# Altium PCB pcb_ummugul.PcbDoc
Units mm, origin at the board's own origin, x right, y up, seen from the top; angles counter-clockwise.
Board outline 152.4 x 101.6 mm, 2 copper layers (Top Layer, Bottom Layer); 12 components, 15 nets, 62 pads, 10 vias.
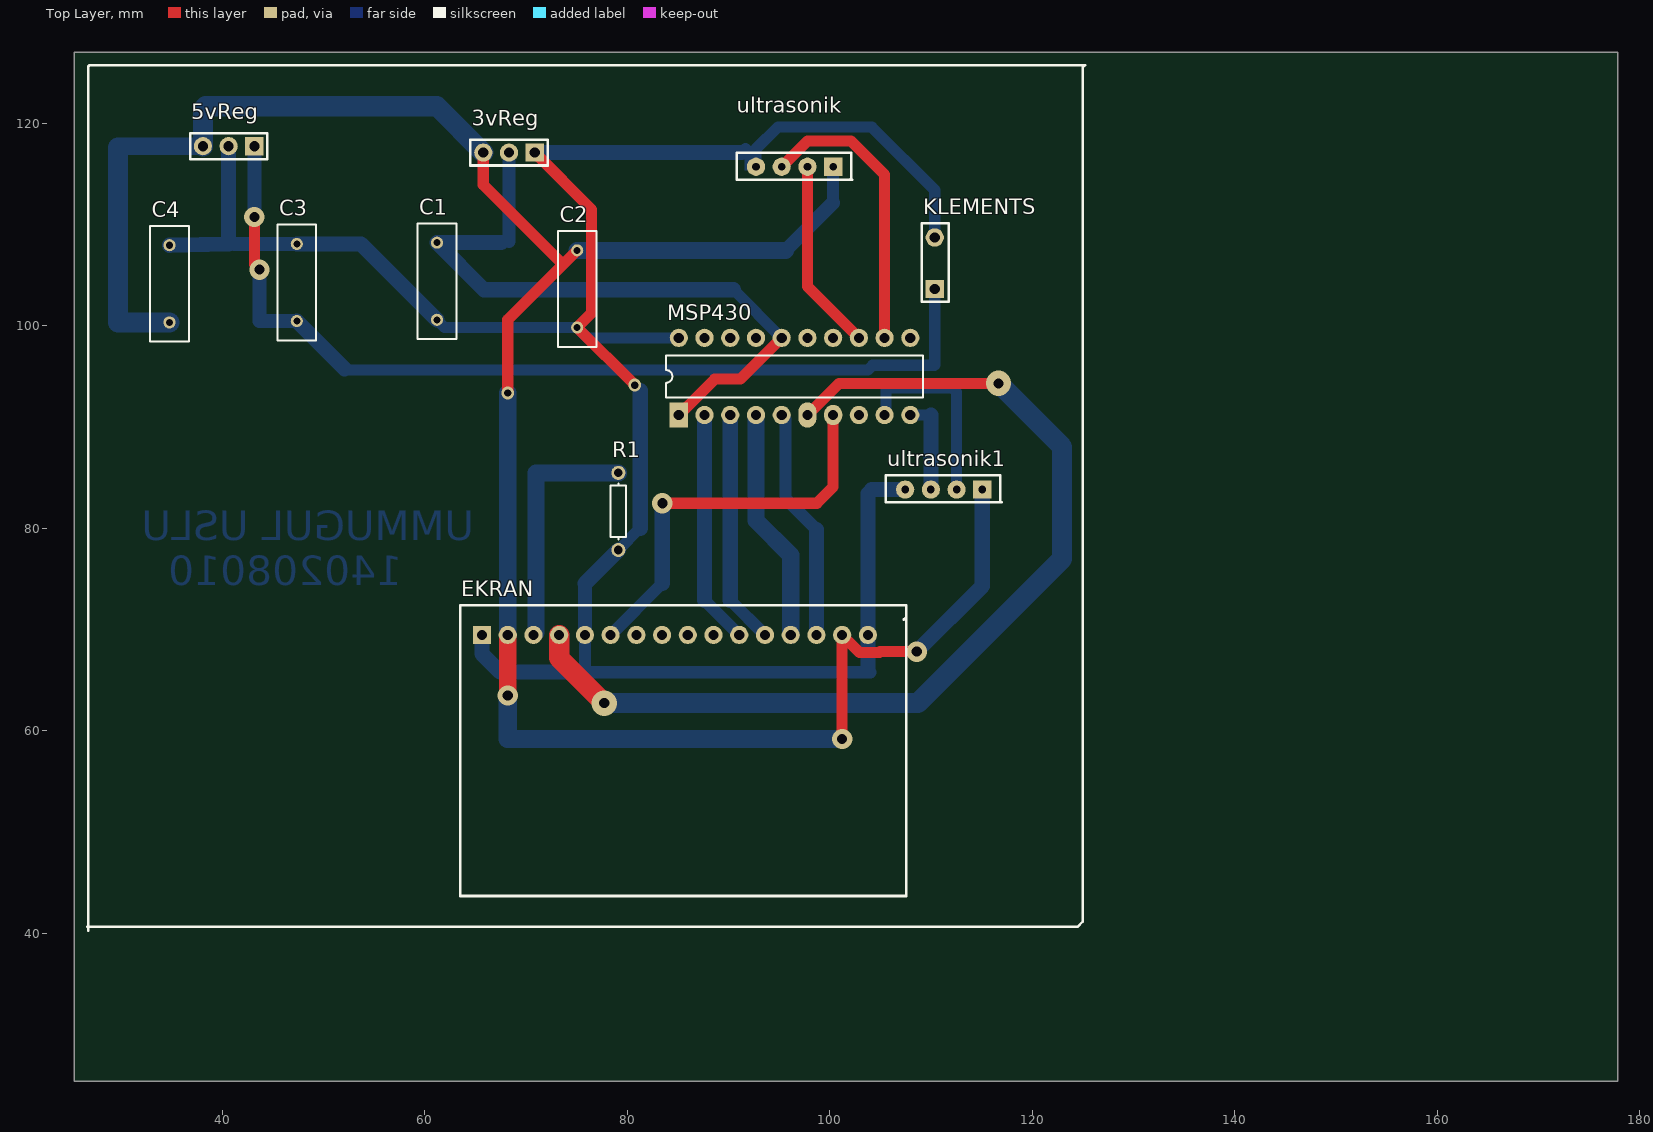
[diagram p0: Top Layer view]
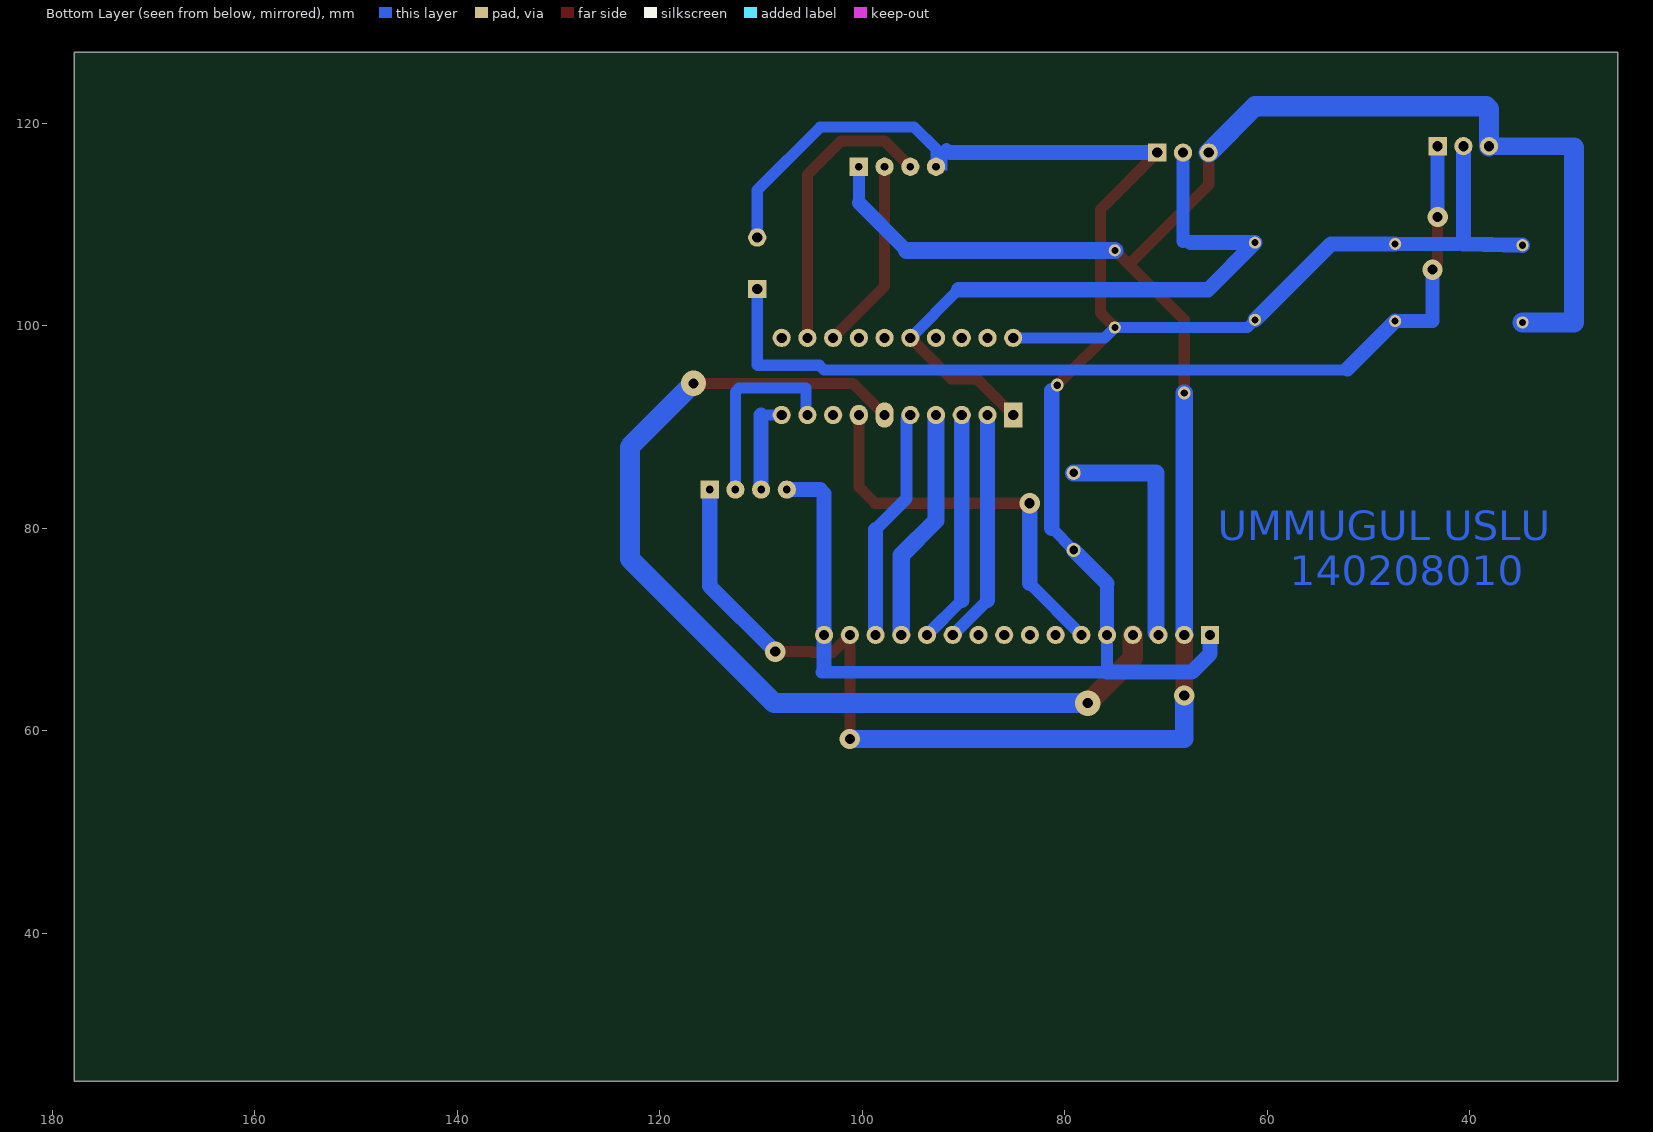
[diagram p1: Bottom Layer view, seen from below]

## Layer stack, top to bottom
Top Solder: solder mask 0.0102, Solder Resist, Dk 3.5
Top Layer: signal copper 0.0356
Dielectric 1: dielectric 0.32, FR-4, Dk 4.8
Bottom Layer: signal copper 0.0356
Bottom Solder: solder mask 0.0102, Solder Resist, Dk 3.5

## Board outline
25.4,25.4 177.8,25.4 177.8,127 25.4,127

## Design rules (kind name [scope] priority, off if disabled: settings)
Clearance [All] p1: gap=0.254
PolygonConnect [All] p1: connectstyle=Relief reliefconductorwidth=0.254 reliefentries=4 polygonreliefangle="90 Angle" airgapwidth=0.254
RoutingVias [All] p1: holewidth=0.711 width=1.27 viastyle="Through Hole" minholewidth=0.711 minwidth=1.27 maxholewidth=0.711 maxwidth=1.27
SolderMaskExpansion [All] p1: expansion=0.102
UnpouredPolygon [All] p1: allowunpoured=FALSE
Width [All] p1: maxlimit=2 minlimit=1 preferedwidth=1.1 minimp=50.000000 maximp=50.000000 favimp=50.000000
29 further rules are at their usual default settings.

## Components (designator, comment, footprint, x,y, rotation, side; value= is the part's Value field where it differs from the comment)
3vReg "LM1117" 3v3regulatorum_ 70.866,117.094 r180 top
5vReg "LM7805" 5vregulatorum_ 43.18,117.729 r180 top
C1 "Cap" RAD-0.3 61.214,104.394 r90 top
C2 "Cap" RAD-0.3 75.057,103.632 r90 top
C3 "Cap" RAD-0.3 47.371,104.267 r270 top
C4 "Cap" RAD-0.3 34.798,104.14 r270 top
EKRAN "EKRAN" "EKRAN - duplicate" 65.659,69.469 r90 top
KLEMENTS "KLEMENTS" klements 110.363,106.172 r90 top
MSP430 "MSP430" msp430 85.09,91.186 r90 top
R1 "Res1" AXIAL-0.3 79.121,81.661 r90 top
ultrasonik "ultrasonik" ultrasonik 100.33,115.697 r180 top
ultrasonik1 "ultrasonik" ultrasonik 115.062,83.82 r180 top

## Footprints (in the part's own frame and the unit in brackets; to place one, negate y for a bottom-side part, rotate by r counter-clockwise, add the part's x,y. Pads: shape width x height; smd on the part's side, far side on the other; paste and mask are expansions set on the pad)
3v3regulatorum_ [mm]
  rect 1.8x1.8 hole 1: 0(0,0)
  round 1.8 hole 1: 1(2.54,0) 2(5.08,0)
  silkscreen extent -1.27,-1.27 6.35,1.27, body extent -1.27,-1.27 6.35,1.27, height 7
5vregulatorum_ [mm]
  rect 1.8x1.8 hole 1: 1(0,0)
  round 1.8 hole 1: 2(2.54,0) 3(5.08,0)
  silkscreen extent -1.27,-1.27 6.35,1.27, body extent -1.27,-1.27 6.35,1.27, height 7
AXIAL-0.3 [mm] "Axial Device, Thru-Hole; 2 Leads; 0.3 in Pin Spacing"
  round 1.4 hole 0.85: 1(-3.81,0) 2(3.81,0)
  silkscreen extent -2.77,-0.76 2.77,0.76
"EKRAN - duplicate" [mm]
  rect 1.8x1.8 hole 1: 1(0,0)
  round 1.8 hole 1: 2(0,-2.54) 3(0,-5.08) 4(0,-7.62) 5(0,-10.16) 6(0,-12.7) 7(0,-15.24) 8(0,-17.78) 9(0,-20.32) 10(0,-22.86) 11(0,-25.4) 12(0,-27.94) 13(0,-30.48) 14(0,-33.02) 15(0,-35.56) 16(0,-38.1)
  silkscreen extent -25.78,-41.91 2.92,2.16, body extent -25.78,-41.78 2.79,2.16, height 8
klements [mm]
  rect 1.8x1.8 hole 1: 1(-2.54,0)
  round 1.8 hole 1: 2(2.54,0)
  silkscreen extent -3.81,-1.4 3.94,1.27
msp430 [mm]
  rect 2.5x1.8 hole 1: 1(0,0)
  round 1.8 hole 1: 2(0,-2.54) 3(0,-5.08) 4(0,-7.62) 5(0,-10.16) 8(0,-17.78) 9(0,-20.32) 10(0,-22.86) 11(7.62,-22.86) 12(7.62,-20.32) 13(7.62,-17.78) 14(7.62,-15.24) 15(7.62,-12.7) 16(7.62,-10.16) 17(7.62,-7.62) 18(7.62,-5.08) 19(7.62,-2.54) 20(7.62,0)
  oval 2.5x1.8 hole 1: 6(0,-12.7)
  oval 2x1.8 hole 1: 7(0,-15.24)
  silkscreen extent 1.74,-24.13 5.89,1.27
RAD-0.3 [mm] "Radial Cap, Thru-Hole; 2 Leads; 0.3 in Pin Spacing"
  round 1.2 hole 0.7: 1(-3.81,0) 2(3.81,0)
  silkscreen extent -5.71,-1.91 5.71,1.91
ultrasonik [mm]
  rect 1.8x1.8 hole 0.762: 1(0,0)
  round 1.8 hole 0.762: 2(2.54,0) 3(5.08,0) 4(7.62,0)
  silkscreen extent -1.91,-1.4 9.53,1.27, body extent -1.78,-1.4 9.53,1.27, height 7

## Part data
C1 C2 C3 C4: "Capacitor"
R1: "Resistor"

## Via types
v1: diameter 2, hole 1, Top Layer to Bottom Layer, 6 vias
v2: diameter 2.5, hole 1, Top Layer to Bottom Layer, 2 vias
v3: diameter 1.27, hole 0.711, Top Layer to Bottom Layer, 2 vias

## Nets (pads, with @x,y where several pads share a name; then routed paths per layer and width w, separated by ;. In a path a pad name is that pad's centre, name@x,y a point inside that pad or via, vN(x,y) a via of type N, cw(c..) or ccw(c..) an arc to the next point about the centre after c; other vN are vias at no path point)
3V: 3vReg.1 C1.2 MSP430.1 MSP430.16 | length 66.4
  Top Layer w1.1: MSP430.1 88.646,94.742 91.186,94.742 MSP430.16
  Bottom Layer w1.1: 90.5,103.556 MSP430.16
  Bottom Layer w1.3: 68.326,108.331 3vReg.1
  Bottom Layer w1.5: 67.564,108.204 C1.2 65.862,103.556 90.5,103.556
5V: 3vReg.2 5vReg.3 C2.2 C4.2 EKRAN.2 EKRAN.15 ultrasonik1.1 ultrasonik.1 | length 230.5
  Top Layer w1.1: 3vReg.2 65.786,113.919 73.596,106.108 73.596,105.981 ; v3(68.199,93.345) 68.199,100.584 73.596,105.981 ; C2.2 73.596,105.981 ; v1(101.219,59.182) EKRAN.15 102.946,67.742 104.902,67.742 104.978,67.818 v1(108.585,67.818)
  Top Layer w1.7: v1(68.199,63.5) EKRAN.2
  Bottom Layer w1.1: 29.718,117.602 29.845,117.729 ; 38.1,121.412 38.354,121.666 ; v3(68.199,93.345) v3@68.199,93.472
  Bottom Layer w1.2: 100.33,112.141 ultrasonik.1
  Bottom Layer w1.4: 95.631,107.442 100.33,112.141
  Bottom Layer w1.5: v1(108.585,67.818) 115.062,74.295 ultrasonik1.1
  Bottom Layer w1.7: 29.845,117.729 5vReg.3 ; EKRAN.2 v3(68.199,93.345) ; C2.2 95.631,107.442
  Bottom Layer w1.8: v1@68.199,63.373 68.199,59.182 v1(101.219,59.182)
  Bottom Layer w2: 29.718,117.602 29.718,100.33 C4.2 ; 5vReg.3 38.1,121.412 ; 38.354,121.666 61.214,121.666 3vReg.2
9V: 5vReg.1 C3.2 KLEMENTS.1 | length 93.1
  Top Layer w1.1: v1@43.18,106.045 v1(43.18,110.744)
  Bottom Layer w1.1: 52.07,95.631 103.749,95.631 104.214,96.096 110.32,96.096 110.363,96.139 KLEMENTS.1
  Bottom Layer w1.4: v1(43.18,110.744) 5vReg.1 ; v1(43.688,105.537) 43.688,100.457 C3.2
  Bottom Layer w1.5: C3.2 52.07,95.758
GND: 3vReg.0 5vReg.2 C1.1 C2.1 C3.1 C4.1 EKRAN.1 EKRAN.5 EKRAN.16 KLEMENTS.2 MSP430.20 R1.1 ultrasonik1.4 ultrasonik.4 | length 234.5
  Top Layer w1.1: 3vReg.0 76.479,111.481 76.479,101.244 C2.1 v3(80.747,94.132)
  Bottom Layer w1.1: 40.652,108.066 41.224,108.077 ; C1.1 61.976,99.822 C2.1 76.073,98.806 MSP430.20 ; R1.1 81.28,80.01 ; v3(80.747,94.132) 81.28,93.599 ; 91.313,117.094 91.694,117.475 ultrasonik.4@92.71,116.459 ; ultrasonik.4 ultrasonik.4@92.71,116.459 ; 103.759,83.439 104.14,83.82 ; KLEMENTS.2 110.363,113.411 104.14,119.634 94.869,119.634 92.71,117.475 ultrasonik.4@92.71,116.459
  Bottom Layer w1.2: EKRAN.5 75.819,65.786 104.013,65.786
  Bottom Layer w1.4: 41.224,108.077 C3.1 ; EKRAN.5 75.819,74.549
  Bottom Layer w1.5: C4.1 40.652,108.066 ; 40.64,108.661 5vReg.2 ; C3.1 53.721,108.077 C1.1 ; EKRAN.1 65.659,67.605 67.452,65.812 75.793,65.812 ; 3vReg.0 91.313,117.094 ; 75.819,74.549 R1.1 ; 81.28,80.01 81.28,93.599 ; 103.759,66.04 EKRAN.16 103.759,83.439 ; 104.14,83.82 ultrasonik1.4
NetEKRAN_3: EKRAN.3 R1.2 | length 23.9
  Bottom Layer w1.7: EKRAN.3@70.993,69.723 70.993,85.471 R1.2
NetEKRAN_4: EKRAN.4 MSP430.6 | length 99.8
  Top Layer w1.1: MSP430.6 100.914,94.31 v2(116.662,94.31)
  Top Layer w2: EKRAN.4 73.279,67.183 v2(77.724,62.738)
  Bottom Layer w2: v2(77.724,62.738) 108.687,62.738 122.936,76.987 122.936,88.036 v2(116.662,94.31)
NetEKRAN_6: EKRAN.6 MSP430.7 | length 39.8
  Top Layer w1.1: v1(83.464,82.474) 98.73,82.474 100.33,84.074 MSP430.7
  Bottom Layer w1.2: EKRAN.6 83.464,74.574
  Bottom Layer w1.5: 83.464,74.574 v1(83.464,82.474)
NetEKRAN_11: EKRAN.11 MSP430.2 | length 23.1
  Bottom Layer w1.2: 87.63,72.898 EKRAN.11
  Bottom Layer w1.5: 87.63,72.898 MSP430.2
NetEKRAN_12: EKRAN.12 MSP430.3 | length 23.1
  Bottom Layer w1.2: 90.17,72.898 EKRAN.12
  Bottom Layer w1.5: 90.17,72.898 MSP430.3
NetEKRAN_13: EKRAN.13 MSP430.4 | length 23.1
  Bottom Layer w1.7: MSP430.4 92.71,80.772 96.139,77.343 EKRAN.13
NetEKRAN_14: EKRAN.14 MSP430.5 | length 23.1
  Bottom Layer w1.2: MSP430.5 95.631,90.805 95.631,82.931 98.679,79.883
  Bottom Layer w1.5: EKRAN.14 98.679,79.883
NetMSP430_9: MSP430.9 ultrasonik1.2 | length 19.5
  Bottom Layer w1.1: MSP430.9 105.537,91.313 105.537,93.853 112.141,93.853 112.522,93.472 ultrasonik1.2
NetMSP430_10: MSP430.10 ultrasonik1.3 | length 9.4
  Bottom Layer w1.1: MSP430.10 109.982,91.186
  Bottom Layer w1.5: ultrasonik1.3 109.982,91.186
NetMSP430_12: MSP430.12 ultrasonik.3 | length 28.7
  Top Layer w1.1: ultrasonik.3 97.79,118.237 102.108,118.237 105.41,114.935 MSP430.12
NetMSP430_13: MSP430.13 ultrasonik.2 | length 19
  Top Layer w1.1: ultrasonik.2 97.79,103.886 MSP430.13
pads on no net: EKRAN.7 EKRAN.8 EKRAN.9 EKRAN.10 MSP430.8 MSP430.11 MSP430.14 MSP430.15 MSP430.17 MSP430.18 MSP430.19

## Other copper
Bottom Layer:
  rectangle net GND: 91.567,115.316 92.837,117.602
  text "UMMUGUL USLU" at 64.897,77.851 h5
  text "140208010" at 57.785,73.406 h5

## Silkscreen, mask and mechanical layers (free items; w line width, h text height)
Top Overlay:
  lines w0.254: 26.67,40.64 124.46,40.64 124.968,41.148 124.968,125.476 125.222,125.73 27.178,125.73 ; 26.797,40.259 26.797,124.587 ; 26.797,124.206 26.797,125.603 26.924,125.73 27.432,125.73